# Altium PCB PCB.PcbDoc
Units mm, origin at the board's own origin, x right, y up, seen from the top; angles counter-clockwise.
Board outline 77.72 x 90.17 mm, 2 copper layers (Top Layer, Bottom Layer), stack 0.536 mm thick; 24 components, 68 nets, 304 pads, 15 vias.
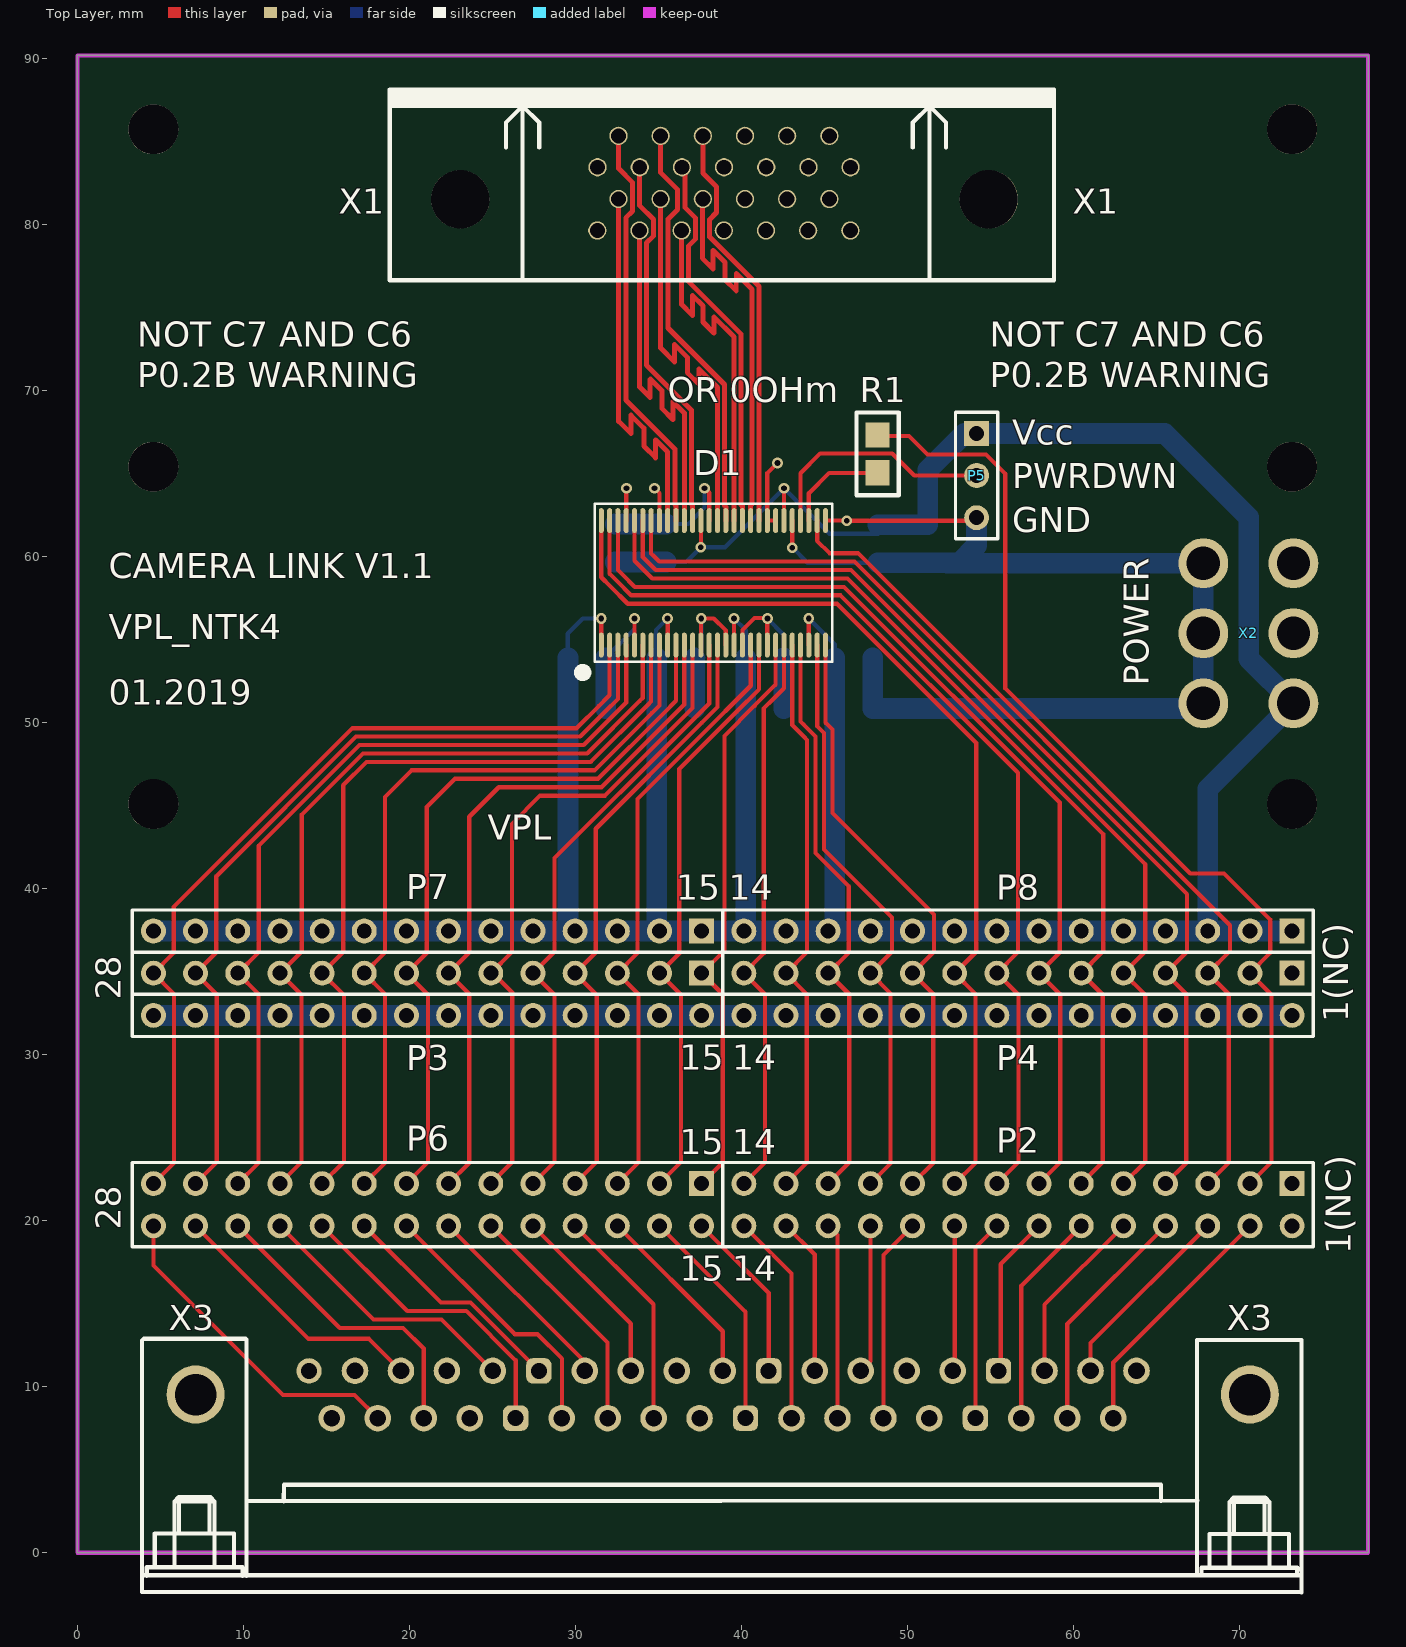
[diagram p0: Top Layer view]
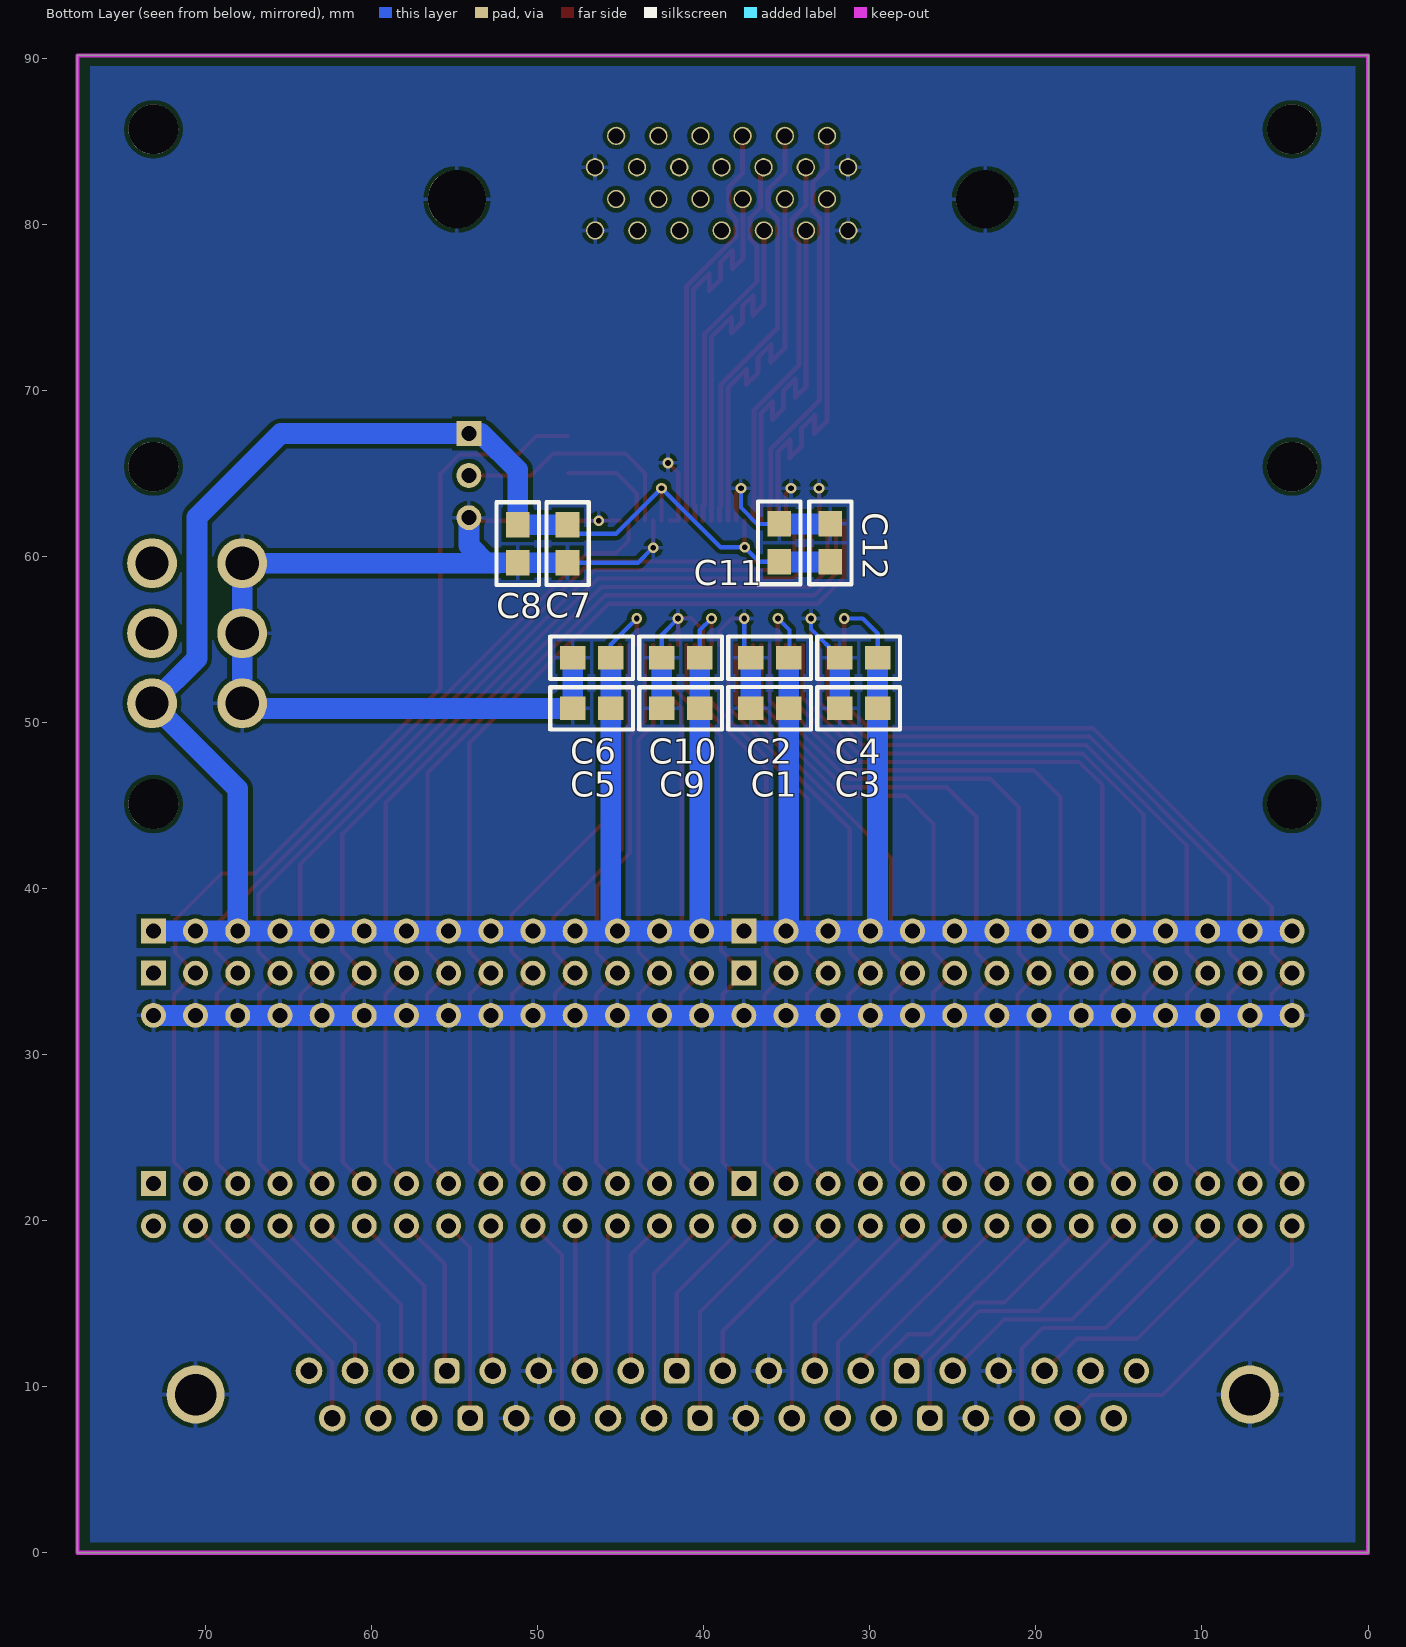
[diagram p1: Bottom Layer view, seen from below]

## Layer stack, top to bottom
Top Solder: solder mask 0.0102, Solder Resist, Dk 3.5
Top Layer: signal copper 0.018
Dielectric 1: dielectric 0.5, FR-4, Dk 4.6
Bottom Layer: signal copper 0.018
Bottom Solder: solder mask 0.0102, Solder Resist, Dk 3.5

## Board outline
0,0 77.724,0 77.724,90.17 0,90.17

## Design rules (kind name [scope] priority, off if disabled: settings)
Clearance [All] p1: gap=0.125
DiffPairsRouting [All] p1: maxlimit=0.125 minlimit=0.125 mostfreqgap=0.125 toplayer_minwidth=0.125 toplayer_maxwidth=0.35 toplayer_prefwidth=0.368 bottomlayer_minwidth=0.125 bottomlayer_maxwidth=0.35 bottomlayer_prefwidth=0.368 maxuncoupledlength=12.7
PolygonConnect [All] p1: connectstyle=Relief reliefconductorwidth=0.254 reliefentries=4 polygonreliefangle="90 Angle" airgapwidth=0.254
RoutingVias [All] p1: holewidth=0.711 width=1.27 viastyle="Through Hole" minholewidth=0.711 minwidth=1.27 maxholewidth=0.711 maxwidth=1.27
SolderMaskExpansion [All] p1: expansion=0.102
Width [All] p1: maxlimit=1.254 minlimit=0.125 preferedwidth=0.254
28 further rules are at their usual default settings.

## Classes and differential pairs
differential pair LVDS_CLK: +LVDS_CLK_P -LVDS_CLK_N
differential pair LVDS_TX0: +LVDS_TX0_P -LVDS_TX0_N
differential pair LVDS_TX1: +LVDS_TX1_P -LVDS_TX1_N
differential pair LVDS_TX2: +LVDS_TX2_P -LVDS_TX2_N
differential pair LVDS_TX3: +LVDS_TX3_P -LVDS_TX3_N

## Components (designator, comment, footprint, x,y, rotation, side; value= is the part's Value field where it differs from the comment)
C1 "0,1" CAP_SMALL 33.528,52.126 r0 bottom
C2 "0,01" CAP_SMALL 33.528,55.169 r0 bottom
C3 "0,1" CAP_SMALL 28.169,52.121 r0 bottom
C4 "0,01" CAP_SMALL 28.169,55.169 r0 bottom
C5 "0,1" CAP_SMALL 44.247,52.121 r0 bottom
C6 "0,01" CAP_SMALL 44.247,55.169 r0 bottom
C7 "0,1" CAP_SMALL 49.479,63.271 r270 bottom
C8 "0,01" CAP_SMALL 52.476,63.271 r270 bottom
C9 "0,1" CAP_SMALL 38.887,52.121 r0 bottom
C10 "0,01" CAP_SMALL 38.887,55.169 r0 bottom
C11 "0,1" CAP_SMALL 34.186,58.31 r90 bottom
C12 "0,01" CAP_SMALL 31.112,58.31 r90 bottom
D1 "DS90CR285" TSSOP56 31.547,54.661 r90 top
P2 "JUMP2,3" HDR2X14 73.152,22.225 r180 top
P3 "JUMP2,3" HDR2X14 37.592,34.9 r180 top
P4 "JUMP2,3" HDR2X14 73.152,34.9 r180 top
P5 "PWRDWN" HDR1X3 54.153,67.412 r270 top
P6 "JUMP2,3" HDR2X14 37.592,22.225 r180 top
P7 "JUMP1" HDR1X14 37.592,37.44 r180 top
P8 "JUMP1" HDR1X14 73.152,37.44 r180 top
R1 "33" RES 49.428,68.656 r180 top
X1 "MDR_26" MDR26 54.878,81.509 r180 top
X2 "POWER" POWER 65.608,55.372 r270 top
X3 "D-SUB" CHEAP_CONN_FEMALE 70.612,9.525 r180 top

## Footprints (in the part's own frame and the unit in brackets; to place one, negate y for a bottom-side part, rotate by r counter-clockwise, add the part's x,y. Pads: shape width x height; smd on the part's side, far side on the other; paste and mask are expansions set on the pad)
CAP_SMALL [mil] "FROM_MAX"
  rect 60x55.98 smd: 1(53.71,50) 2(143.71,50)
  silkscreen extent 1,0 197,100, body extent 20,18 178,82, height 100
CHEAP_CONN_FEMALE [mm] "CHEAP_CONN_FEMALE"
  round 1.6 hole 1: 1(6.833,-1.422) 2(9.601,-1.422) 3(12.37,-1.422) 5(17.907,-1.422) 6(20.676,-1.422) 7(23.444,-1.422) 8(26.213,-1.422) 10(31.75,-1.422) 11(34.519,-1.422) 12(37.287,-1.422) 13(40.056,-1.422) 15(45.593,-1.422) 16(48.362,-1.422) 17(51.13,-1.422) 18(53.899,-1.422) 20(8.23,1.422) 21(10.998,1.422) 22(13.767,1.422) 24(19.304,1.422) 25(22.073,1.422) 26(24.841,1.422) 27(27.61,1.422) 29(33.147,1.422) 30(35.916,1.422) 31(38.684,1.422) 32(41.453,1.422) 34(46.99,1.422) 35(49.759,1.422) 36(52.527,1.422) 37(55.296,1.422)
  rrect50% 1.524x1.524 hole 0.965: 4(15.138,-1.422) 9(28.981,-1.422) 14(42.824,-1.422) 23(16.535,1.422) 28(30.378,1.422) 33(44.221,1.422)
  round 1.524 hole 0.965: 19(56.667,-1.422)
  round 3.5 hole 2.5: 38(0,0) 39(63.5,0)
  silkscreen extent -3.11,-3.36 66.72,11.92
HDR1X3 [mm] "Connector; Header; 3 Position"
  rect 1.5x1.5 hole 0.9: 1(0,0)
  round 1.5 hole 0.9: 2(2.54,0) 3(5.08,0)
  silkscreen extent -1.27,-1.27 6.35,1.27
HDR1X14 [mm] "Connector; Header; 14 Position"
  rect 1.5x1.5 hole 0.9: 1(0,0)
  round 1.5 hole 0.9: 2(2.54,0) 3(5.08,0) 4(7.62,0) 5(10.16,0) 6(12.7,0) 7(15.24,0) 8(17.78,0) 9(20.32,0) 10(22.86,0) 11(25.4,0) 12(27.94,0) 13(30.48,0) 14(33.02,0)
  silkscreen extent -1.27,-1.27 34.29,1.27
HDR2X14 [mm] "Connector; Header; 14x2 Position"
  rect 1.5x1.5 hole 0.9: 1(0,0)
  round 1.5 hole 0.9: 2(0,2.54) 3(2.54,0) 4(2.54,2.54) 5(5.08,0) 6(5.08,2.54) 7(7.62,0) 8(7.62,2.54) 9(10.16,0) 10(10.16,2.54) 11(12.7,0) 12(12.7,2.54) 13(15.24,0) 14(15.24,2.54) 15(17.78,0) 16(17.78,2.54) 17(20.32,0) 18(20.32,2.54) 19(22.86,0) 20(22.86,2.54) 21(25.4,0) 22(25.4,2.54) 23(27.94,0) 24(27.94,2.54) 25(30.48,0) 26(30.48,2.54) 27(33.02,0) 28(33.02,2.54)
  silkscreen extent -1.27,-1.27 34.29,3.81
MDR26 [mm] "MDR26"
  round 1.1 hole 0.9: 1(23.571,1.88) 2(22.296,-0.015) 3(21.031,1.88) 4(19.756,-0.015) 5(18.491,1.88) 6(17.216,-0.015) 7(15.951,1.88) 8(14.676,-0.015) 9(13.411,1.88) 10(12.136,-0.015) 11(10.871,1.88) 12(9.596,-0.015) 13(8.331,1.88) 14(23.556,-1.93) 15(22.296,-3.82) 16(21.016,-1.93) 17(19.756,-3.82) 18(18.476,-1.93) 19(17.216,-3.82) 20(15.936,-1.93) 21(14.676,-3.82) 22(13.396,-1.93) 23(12.136,-3.82) 24(10.856,-1.93) 25(9.596,-3.82) 26(8.316,-1.93)
  round 3.5 hole 3.5: 27(31.826,0) 28(0,0)
  silkscreen extent -3.93,-6.62 36.07,4.88
POWER [mm] "POWER"
  round 3 hole 2: 1(4.217,7.62) 2(0,7.62) 3(-4.217,7.62) 4(4.217,2.198) 5(0,2.198) 6(-4.217,2.198)
RES [mil] "FROM_MAX"
  rect 55.98x60 smd: 1(49,52.71) 2(49,142.71)
  silkscreen extent -1,0 99,196, body extent 17,19 81,177, height 100
TSSOP56 [mm]
  oval 1.5x0.3 smd: 1(0,0) 2(0,-0.5) 3(0,-1) 4(0,-1.5) 5(0,-2) 6(0,-2.5) 7(0,-3) 8(0,-3.5) 9(0,-4) 10(0,-4.5) 11(0,-5) 12(0,-5.5) 13(0,-6) 14(0,-6.5) 15(0,-7) 16(0,-7.5) 17(0,-8) 18(0,-8.5) 19(0,-9) 20(0,-9.5) 21(0,-10) 22(0,-10.5) 23(0,-11) 24(0,-11.5) 25(0,-12) 26(0,-12.5) 27(0,-13) 28(0,-13.5) 29(7.5,-13.5) 30(7.5,-13) 31(7.5,-12.5) 32(7.5,-12) 33(7.5,-11.5) 34(7.5,-11) 35(7.5,-10.5) 36(7.5,-10) 37(7.5,-9.5) 38(7.5,-9) 39(7.5,-8.5) 40(7.5,-8) 41(7.5,-7.5) 42(7.5,-7) 43(7.5,-6.5) 44(7.5,-6) 45(7.5,-5.5) 46(7.5,-5) 47(7.5,-4.5) 48(7.5,-4) 49(7.5,-3.5) 50(7.5,-3) 51(7.5,-2.5) 52(7.5,-2) 53(7.5,-1.5) 54(7.5,-1) 55(7.5,-0.5) 56(7.5,0)
  silkscreen extent -1,-13.9 8.5,0.4

## Part data
C1 C2 C3 C4 C5 C6 C7 C8 C9 C10 C11 C12: library part CAP_SMALL
P2 P3 P4 P6: library part "Header 14X2", "Header, 14-Pin, Dual row"
P5: library part "Header 3", "Header, 3-Pin"
P7 P8: library part "Header 14", "Header, 14-Pin"
R1: library part RES
X3: library part CHEAP_CON_37_FEMALE

## Free pads (board coordinates)
  round 3 hole 3 unplated: 0(4.572,45.085) 0(4.572,65.405) 0(4.572,85.725) 0(73.152,45.085) 0(73.152,65.405) 0(73.152,85.725)

## Via types
v1: diameter 0.65, hole 0.35, Top Layer to Bottom Layer, 15 vias

## Nets (pads, with @x,y where several pads share a name; then routed paths per layer and width w, separated by ;. In a path a pad name is that pad's centre, name@x,y a point inside that pad or via, vN(x,y) a via of type N, cw(c..) or ccw(c..) an arc to the next point about the centre after c; other vN are vias at no path point)
GND: C1.2 C2.2 C3.2 C4.2 C5.2 C6.2 C7.2 C8.2 C9.2 C10.2 C11.2 C12.2 D1.5 D1.13 D1.16 D1.18 D1.21 D1.29 D1.33 D1.35 D1.36 D1.43 D1.49 D1.53 P3.2 P3.4 P3.6 P3.8 P3.10 P3.12 P3.14 P3.16 P3.18 P3.20 P3.22 P3.24 P3.26 P3.28 P4.2 P4.4 P4.6 P4.8 P4.10 P4.12 P4.14 P4.16 P4.18 P4.20 P4.22 P4.24 P4.26 P4.28 P5.3 X1.1 X1.13 X1.14 X1.26 X1.27 X1.28 X2.4 X2.5 X2.6 X3.6 X3.11 X3.16 X3.24 X3.29 X3.34 X3.38 X3.39 | length 184.9
  Top Layer w0.254: D1.53 33.047,64.086 v1(33.071,64.11) ; D1.5 33.547,56.254 v1(33.553,56.261) ; v1(34.747,64.11) 35.047,63.81 D1.49 ; D1.13 37.547,56.267 38.323,56.267 39.047,55.543 D1.16 ; v1(37.77,64.11) 38.047,63.833 D1.43 ; D1.18 40.047,55.566 40.767,56.286 41.514,56.286 41.547,56.253 D1.21 ; D1.35 D1.36 41.547,65.016 v1(42.164,65.634) ; D1.33 43.047,60.534 v1(43.053,60.528) ; D1.29 46.323,62.161 v1(46.33,62.154) 53.975,62.154 P5.3
  Bottom Layer w0.254: C4.2 33.553,55.633 v1(33.553,56.261) ; C11.2 36.789,61.96 37.77,62.941 v1(37.77,64.11) ; v1(37.567,56.261) 37.567,54.018 C2.2@37.686,53.899 ; v1(41.554,56.261) 42.538,55.278 C10.2 ; v1(43.053,60.528) 43.96,59.621 C7.2
  Bottom Layer w1.254: P3.28 P3.26 P3.24 P3.22 P3.20 P3.18 P3.16 P3.14 P3.12 P3.10 P3.8 P3.6 P3.4 P3.2 P4.28 P4.26 P4.24 P4.22 P4.20 P4.18 P4.16 P4.14 P4.12 P4.10 P4.8 P4.6 P4.4 P4.2 ; C3.2 C4.2 ; C12.2 C11.2 ; C1.2 C2.2 ; C9.2 C10.2 ; C6.2 C5.2 67.502,50.851 X2.4 X2.6 52.381,59.589 52.349,59.621 ; C7.2 C8.2 52.349,59.621 ; P5.3 54.153,60.655 53.119,59.621 52.349,59.621
LVDS_CLK_N: D1.40 X1.5 | length 23.1
  Top Layer w0.3: X1.5 36.387,75.17 37.033,74.524 37.033,75.726 37.668,75.091 37.668,74.117 38.329,73.457 38.329,74.431 39.547,73.212 D1.40
LVDS_CLK_P: D1.39 X1.18 | length 23.1
  Top Layer w0.3: X1.18 36.601,83.239 36.601,81.001 37.211,80.391 37.211,79.971 ; 37.211,79.287 37.211,79.104 36.812,78.705 36.812,76.549 39.972,73.388 39.972,63.101 40.047,63.026 D1.39 ; 37.212,79.287 37.212,79.971
LVDS_TX0_N: D1.48 X1.2 | length 24.9
  Top Layer w0.3: X1.2 32.597,81.509 32.597,76.029 32.597,68.14 33.325,67.412 33.325,68.512 34.112,67.725 34.112,66.65 34.823,65.938 34.823,67.014 35.547,66.29 D1.48
LVDS_TX0_P: D1.47 X1.15 | length 24.9
  Top Layer w0.3: X1.15 32.582,83.369 33.437,82.514 33.437,80.808 33.022,80.393 33.022,75.853 33.022,69.417 35.972,66.466 35.972,63.114 36.047,63.039 D1.47
LVDS_TX1_N: D1.46 X1.3 | length 22.9
  Top Layer w0.3: X1.3 33.847,70.217 34.493,69.571 34.493,70.663 34.51,70.68 35.196,69.994 35.196,68.919 35.865,68.25 35.865,69.317 35.869,69.321 36.547,68.643 D1.46
LVDS_TX1_P: D1.45 X1.16 | length 22.9
  Top Layer w0.3: X1.16 33.862,81.124 34.696,80.289 34.696,79.312 34.272,78.887 34.272,71.519 36.972,68.819 36.972,63.155 37.047,63.08 D1.45
LVDS_TX2_N: D1.42 X1.4 | length 25.3
  Top Layer w0.3: X1.4@35.008,81.143 34.874,81.277 X1.4 35.122,72.549 35.966,71.704 35.966,72.754 36.728,71.992 36.728,71.069 37.44,70.358 37.44,71.281 38.547,70.174 D1.42
LVDS_TX2_P: D1.41 X1.17 | length 25.3
  Top Layer w0.3: X1.17 35.122,83.115 36.144,82.093 36.144,80.899 35.56,80.315 35.56,73.762 38.972,70.35 38.972,63.06 39.047,62.985 D1.41
LVDS_TX3_N: D1.38 X1.6 | length 24.9
  Top Layer w0.3: X1.6@37.637,81.524 37.637,77.959 38.278,77.318 38.278,78.435 39.002,77.711 39.002,76.67 39.675,75.997 39.675,77.038 40.622,76.091 40.622,63.152 40.547,63.077 D1.38
LVDS_TX3_P: D1.37 X1.19 | length 24.9
  Top Layer w0.3: X1.19 37.662,83.09 38.487,82.265 38.487,80.71 38.062,80.285 38.062,79.252 41.047,76.267 D1.37
P0.0: P6.22 X3.15 | length 16.4
  Top Layer w0.254: P6.22 17.831,14.046 21.92,14.046 X3.15
P0.1: P6.20 X3.33 | length 18.5
  Top Layer w0.254: P6.20 19.863,14.554 23.419,14.554 26.391,11.582 X3.33
P0.2: P6.18 X3.14 | length 14.1
  Top Layer w0.254: P6.18 21.895,15.062 23.673,15.062 X3.14
P0.3: P6.16 X3.32 | length 16.3
  Top Layer w0.254: P6.16 26.34,13.157 27.711,13.157 29.185,11.684 29.185,8.128 X3.32
P0.4: P6.14 X3.13 | length 12.1
  Top Layer w0.254: P6.14 30.556,11.481 X3.13
P0.5: P6.12 X3.31 | length 14.5
  Top Layer w0.254: P6.12 31.928,12.649 X3.31
P0.6: P6.10 X3.12 | length 11.2
  Top Layer w0.254: P6.10 33.325,13.792 X3.12
P0.7: P6.8 X3.30 | length 13.5
  Top Layer w0.254: P6.8 34.696,14.961 X3.30
P1.0: P6.6 X3.10 | length 11.4
  Top Layer w0.254: P6.6 38.862,13.335 X3.10
P1.1: P6.4 X3.28 | length 13.7
  Top Layer w0.254: P6.4 40.234,14.503 X3.28
P1.2: P6.2 X3.9 | length 10.4
  Top Layer w0.254: P6.2 41.631,15.646 X3.9
P1.3: P2.28 X3.27 | length 12.8
  Top Layer w0.254: P2.28 43.002,16.815 X3.27
P1.4: P2.26 X3.8 | length 9.5
  Top Layer w0.254: P2.26 44.399,17.958 X3.8
P1.5: P2.24 X3.26 | length 11.8
  Top Layer w0.254: P2.24 45.771,19.126 X3.26
P1.6: P2.22 X3.7 | length 9
  Top Layer w0.254: X3.7 47.752,11.532 P2.22
P1.7: P2.20 X3.25 | length 12.3
  Top Layer w0.254: X3.25 48.539,17.932 P2.20
P2.0: P2.18 X3.5 | length 8.8
  Top Layer w0.254: X3.5 52.832,11.074 P2.18
P2.1: P2.16 X3.23 | length 12.1
  Top Layer w0.254: X3.23 54.077,18.39 P2.16
P2.2: P2.14 X3.4 | length 9.7
  Top Layer w0.254: X3.4 55.601,11.074 55.601,17.374 P2.14
P2.3: P2.12 X3.22 | length 13.1
  Top Layer w0.254: X3.22 56.845,16.078 P2.12
P2.4: P2.10 X3.3 | length 10.7
  Top Layer w0.254: X3.3 58.242,14.935 P2.10
P2.5: P2.8 X3.21 | length 14
  Top Layer w0.254: X3.21 59.614,13.767 P2.8
P2.6: P2.6 X3.2 | length 11.7
  Top Layer w0.254: X3.2 61.011,12.624 P2.6
P2.7: P2.4 X3.20 | length 15
  Top Layer w0.254: X3.20 62.382,11.455 P2.4
P3_1: D1.22 P3.1 P6.1 | length 35.3
  Top Layer w0.254: P6.1 38.862,23.495 38.862,33.63 P3.1 38.964,36.271 38.964,49.193 40.783,51.012 42.047,52.276 42.047,52.807 D1.22
P3_3: D1.20 P3.3 P6.3 | length 36
  Top Layer w0.254: P6.3 36.347,23.52 36.347,33.604 P3.3 36.246,36.093 36.246,47.193 39.7,50.648 41.047,51.994 41.047,53.035 D1.20
P3_5: D1.19 P3.5 P6.5 | length 36.8
  Top Layer w0.254: P6.5 33.782,23.495 33.782,33.63 P3.5 33.731,36.119 33.731,45.397 37.436,49.102 40.547,52.213 40.547,53.086 D1.19
P3_7: D1.15 P3.7 P6.7 | length 37.2
  Top Layer w0.254: P6.7 31.267,23.52 31.267,33.604 P3.7 31.217,36.144 31.217,43.601 37.699,50.083 ; 37.603,49.987 38.547,50.931 D1.15
P3_9: D1.14 P3.9 P6.9 | length 37.9
  Top Layer w0.254: P6.9 28.727,23.52 28.727,33.604 P3.9 28.727,36.195 28.727,41.83 36.54,49.643 38.047,51.15 D1.14
P3_11: D1.12 P3.11 P6.11 | length 40.9
  Top Layer w0.254: P6.11 26.187,23.52 26.187,33.731 25.019,34.9 P3.11 26.162,36.17 26.162,43.891 27.864,45.593 31.772,45.593 33.64,47.462 37.047,50.868 D1.12
P3_13: D1.11 P3.13 P6.13 | length 43
  Top Layer w0.254: P6.13 23.597,23.47 23.597,33.655 P3.13 23.597,36.144 23.597,44.323 25.375,46.101 31.561,46.101 35.491,50.031 36.547,51.087 D1.11
P3_15: D1.10 P3.15 P6.15 | length 45.3
  Top Layer w0.254: P6.15 21.107,23.52 21.107,33.604 P3.15 21.031,36.119 21.031,44.907 22.733,46.609 31.351,46.609 35.288,50.546 36.047,51.305 D1.10
P3_17: D1.8 P3.17 P6.17 | length 47.3
  Top Layer w0.254: P6.17 18.517,23.47 18.517,33.655 P3.17 18.517,36.144 18.517,45.517 20.117,47.117 31.14,47.117 34.62,50.597 35.047,51.023 D1.8
P3_19: D1.7 P3.19 P6.19 | length 49.6
  Top Layer w0.254: P6.19 16.053,23.546 16.053,33.579 P3.19 16.002,36.17 16.002,46.225 17.402,47.625 30.908,47.625 34.352,51.069 34.547,51.264 D1.7
P3_21: D1.6 P3.21 P6.21 | length 50.5
  Top Layer w0.254: P6.21 13.487,23.52 13.487,33.604 P3.21 13.513,36.22 13.513,44.454 17.192,48.133 30.698,48.133 33.878,51.313 34.047,51.482 34.047,52.868 D1.6
P3_23: D1.4 P3.23 P6.23 | length 51.1
  Top Layer w0.254: P6.23 10.897,23.47 10.897,33.655 P3.23 10.922,36.17 10.922,42.581 16.982,48.641 30.487,48.641 32.147,50.301 33.047,51.201 D1.4
P3_25: D1.3 P3.25 P6.25 | length 51.9
  Top Layer w0.254: P6.25 8.382,23.495 8.382,33.63 P3.25 8.357,36.144 8.357,40.734 16.771,49.149 30.277,49.149 31.788,50.66 32.547,51.419 D1.3
P3_27: D1.2 P3.27 P6.27 | length 52.9
  Top Layer w0.254: P6.27 5.817,23.47 5.817,33.655 P3.27 5.791,36.119 5.791,38.887 16.561,49.657 30.066,49.657 31.429,51.02 ; 31.311,50.902 32.047,51.637 D1.2
P4_3: P2.3 P4.3 R1.1 | length 60.8
  Top Layer w0.254: R1.1@48.184,67.259 50.071,67.259 51.189,66.142 54.712,66.142 55.88,64.973 55.88,52.044 67.018,40.907 69.05,40.907 71.831,38.125 71.831,36.119 P4.3 71.907,33.604 71.907,23.52 P2.3
P4_5: D1.30 P2.5 P4.5 | length 52.9
  Top Layer w0.254: D1.30 44.547,60.939 45.288,60.198 47.008,60.198 69.418,37.788 69.418,36.246 P4.5 69.342,33.63 69.342,23.495 P2.5
P4_7: D1.50 P2.7 P4.7 | length 61.8
  Top Layer w0.254: D1.50 34.547,60.177 34.675,60.049 35.034,59.69 46.797,59.69 66.827,39.66 66.827,36.195 P4.7 66.777,33.655 66.777,23.47 P2.7
P4_9: D1.51 P2.9 P4.9 | length 61
  Top Layer w0.254: D1.51 34.047,59.959 34.315,59.69 34.823,59.182 46.587,59.182 64.313,41.456 64.313,36.22 P4.9 64.313,33.579 64.313,23.546 P2.9
P4_11: D1.52 P2.11 P4.11 | length 60.1
  Top Layer w0.254: D1.52 33.547,59.74 33.956,59.331 34.613,58.674 46.377,58.674 61.773,43.278 61.773,36.22 P4.11 61.747,33.604 61.747,23.52 P2.11
P4_13: D1.54 P2.13 P4.13 | length 59.9
  Top Layer w0.254: D1.54 32.547,59.18 32.82,58.906 33.561,58.166 46.166,58.166 59.157,45.176 59.157,36.144 P4.13 59.182,33.63 59.182,23.495 P2.13
P4_15: D1.55 P2.15 P4.15 | length 59.1
  Top Layer w0.254: D1.55 32.047,58.961 32.461,58.547 33.35,57.658 45.956,57.658 56.642,46.972 56.642,36.17 P4.15 56.667,33.604 56.667,23.52 P2.15
P4_17: D1.56 P2.17 P4.17 | length 58.2
  Top Layer w0.254: D1.56 31.547,58.743 32.102,58.188 33.14,57.15 45.745,57.15 54.127,48.768 54.127,36.195 P4.17 54.077,33.655 54.077,23.47 P2.17
P4_19: D1.28 P2.19 P4.19 | length 36.7
  Top Layer w0.254: D1.28 45.047,52.984 45.047,49.996 45.055,49.988 45.466,49.577 45.466,44.552 51.587,38.43 51.587,36.195 P4.19 51.537,33.655 51.537,23.47 P2.19
P4_21: D1.27 P2.21 P4.21 | length 35.8
  Top Layer w0.254: D1.27 44.547,53.01 44.547,49.778 44.749,49.575 44.958,49.367 44.958,42.349 49.047,38.26 49.047,36.195 P4.21 48.971,33.68 48.971,23.444 P2.21
P4_23: D1.25 P2.23 P4.23 | length 35.2
  Top Layer w0.254: D1.25 43.547,53.111 43.547,50.059 43.704,49.902 44.45,49.156 44.45,42.139 46.457,40.132 46.457,36.144 P4.23 46.482,33.63 46.482,23.495 P2.23
P4_25: D1.24 P2.25 P4.25 | length 34.4
  Top Layer w0.254: P2.25 43.917,23.47 43.917,33.655 P4.25 43.942,36.17 43.942,48.946 43.739,49.149 43.047,49.841 43.047,53.137 D1.24
P4_27: D1.23 P2.27 P4.27 | length 34.5
  Top Layer w0.254: P2.27 41.402,23.495 41.402,33.63 P4.27 41.326,36.093 41.326,50.837 41.917,51.428 42.547,52.058 42.547,53.111 D1.23
PFI1: P6.28 X3.36 | length 19.7
  Top Layer w0.254: P6.28 4.572,17.297 12.37,9.5 16.688,9.5 X3.36
PFI2: P6.26 X3.17 | length 16
  Top Layer w0.254: P6.26 13.919,12.878 17.551,12.878 X3.17
PFI3: P6.24 X3.35 | length 18.5
  Top Layer w0.254: P6.24 15.799,13.538 19.609,13.538 20.853,12.294 X3.35
"PWR DWN": D1.32 P5.2 | length 14.5
  Top Layer w0.254: D1.32 43.547,65.01 44.729,66.192 49.073,66.192 50.394,64.872 P5.2
"TXCLK IN": D1.31 R1.2 | length 6.3
  Top Layer w0.254: D1.31 44.047,63.808 45.27,65.031 R1.2
VCC: C1.1 C2.1 C3.1 C4.1 C5.1 C6.1 C7.1 C8.1 C9.1 C10.1 C11.1 C12.1 D1.1 D1.9 D1.17 D1.26 D1.34 D1.44 P5.1 P7.1 P7.2 P7.3 P7.4 P7.5 P7.6 P7.7 P7.8 P7.9 P7.10 P7.11 P7.12 P7.13 P7.14 P8.1 P8.2 P8.3 P8.4 P8.5 P8.6 P8.7 P8.8 P8.9 P8.10 P8.11 P8.12 P8.13 P8.14 X2.1 | length 232.9
  Top Layer w0.254: D1.1 v1(31.547,56.261) ; v1(35.535,56.261) 35.547,56.249 D1.9 ; v1(37.541,60.554) 37.547,60.559 D1.44 ; D1.17 v1(39.548,56.261) v1(39.548,56.261) ; v1(42.545,64.11) 42.547,64.108 D1.34 ; v1(44.044,56.261) 44.047,56.258 D1.26
  Bottom Layer w0.254: C4.1 29.533,55.329 29.515,55.347 30.429,56.261 v1(31.547,56.261) ; C2.1@35.4,53.899 34.849,54.45 34.849,55.575 v1(35.535,56.261) ; C11.1 36.662,59.674 v1(37.541,60.554) 38.989,60.554 v1(42.545,64.11) 45.288,61.366 C7.1@48.209,61.366 ; v1(39.548,56.261) 40.252,55.557 C10.1 ; v1(44.044,56.261) 45.611,54.694 C6.1
  Bottom Layer w1.254: P7.14 P7.13 P7.12 P7.11 P7.10 P7.9 P7.8 P7.7 P7.6 P7.5 P7.4 ; C4.1 C3.1 29.533,37.879 P7.4 ; C12.1 C11.1 ; C2.1 C1.1 34.892,37.599 P7.2 ; C10.1 40.252,37.559 P8.14 ; C6.1 C5.1 45.611,37.839 P8.12 ; C7.1 C8.1 51.206,65.202 53.416,67.412 P5.1 65.481,67.412 70.536,62.357 70.536,53.847 X2.1 68.072,45.998 P8.3 ; P8.1 P8.2 P8.3 ; P7.4 P7.3 P7.2 ; P7.2 P7.1 P8.14 ; P8.14 P8.13 P8.12 ; P8.12 P8.11 P8.10 P8.9 P8.8 P8.7 P8.6 P8.5 P8.4 P8.3
pads on no net: P2.1 P2.2 P4.1 X1.7 X1.8 X1.9 X1.10 X1.11 X1.12 X1.20 X1.21 X1.22 X1.23 X1.24 X1.25 X2.2 X2.3 X3.1 X3.18 X3.19 X3.37

## Polygon pours and split planes (outlines as drawn)
GND on Bottom Layer "Top Layer-No Net" (solid, remove dead copper, pour order 3): 0.762,89.535 0.762,0.635 76.962,0.635 76.962,89.535

## Keep-outs
Keep-Out Layer:
  the board outline again, w0.254

## Silkscreen, mask and mechanical layers (free items; w line width, h text height)
Top Overlay:
  circle w0.254: c30.429,53.01 r0.398
  circle w0.254: c30.429,53.01 r0.185
  circle w0.254: c30.404,53.01 r0.051
  lines w0.2: 3.302,33.63 38.862,33.63 74.422,33.63
  text "X1" at 59.944,80.645 h1.52
  text "NOT C7 AND C6" at 3.607,72.619 h1.52
  text "NOT C7 AND C6" at 54.94,72.619 h1.52
  text "P0.2B WARNING" at 3.607,70.18 h1.52
  text "P0.2B WARNING" at 54.94,70.18 h1.52
  text "OR 0OHm" at 35.56,69.291 h1.52
  text "Vcc" at 56.312,66.726 h1.52
  text "GND" at 56.312,61.468 h1.52
  text "CAMERA LINK V1.1" at 1.88,58.699 h1.52
  text "VPL_NTK4" at 1.88,55.016 h1.52
  text "01.2019" at 1.88,51.079 h1.52
  text "VPL" at 24.714,42.926 h1.52
  text "15" at 36.068,39.319 h1.52
  text "14" at 39.218,39.319 h1.52
  text "28" at 2.591,33.299 h1.52 r90
  text "1(NC)" at 76.53,31.953 h1.52 r90
  text "15" at 36.271,29.083 h1.52
  text "14" at 39.421,29.083 h1.52
  text "15" at 36.271,24.003 h1.52
  text "14" at 39.421,24.003 h1.52
  text "28" at 2.591,19.456 h1.52 r90
  text "1(NC)" at 76.683,17.983 h1.52 r90
  text "15" at 36.271,16.383 h1.52
  text "14" at 39.421,16.383 h1.52
  text "X3" at 5.486,13.386 h1.52